# Altium PCB Sensor_Box_Water_Meter_Valve.PCBDOC (part 2 of 2)
Units mil, origin at the board's own origin, x right, y up, seen from the top; angles counter-clockwise.
Board outline 842.52 x 2866.14 mil, 2 copper layers (Top, Bot), stack 63.824 mil thick; 67 components, 54 nets, 224 pads, 112 vias.
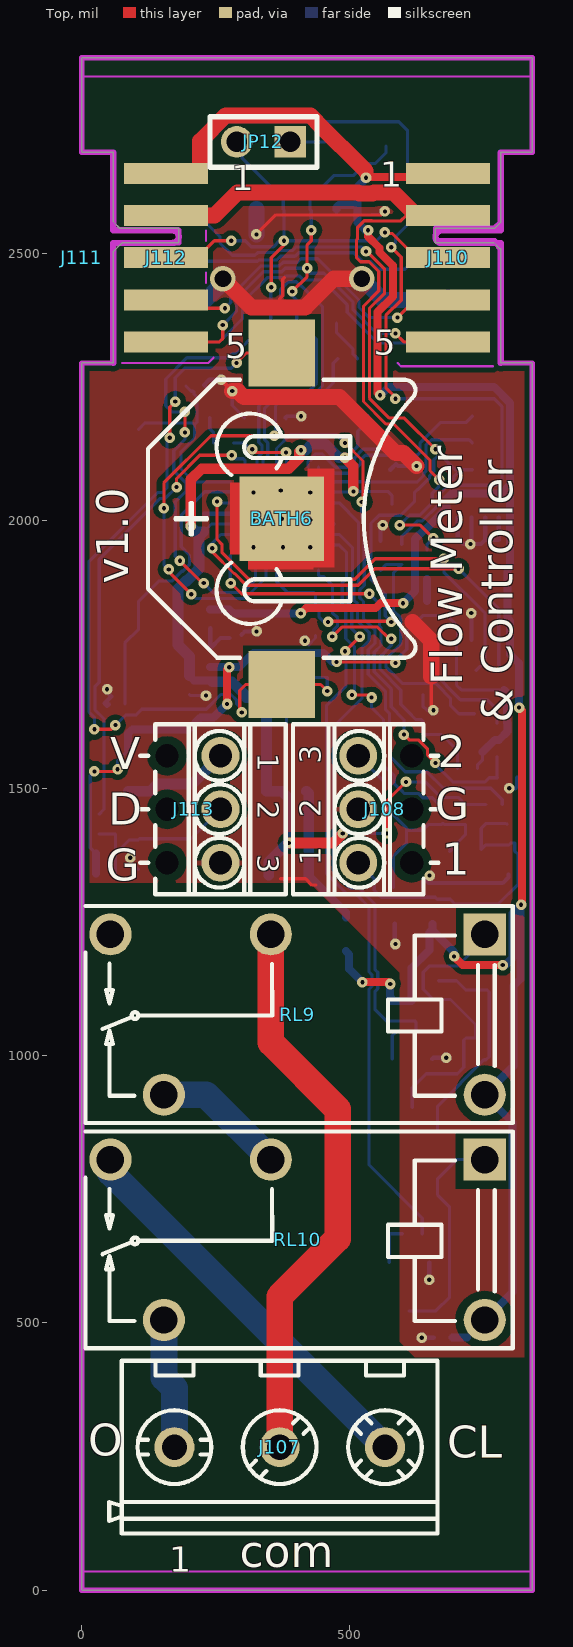
[diagram p0: Top view]

## Via types
v1: diameter 19.68, hole 7.87, Top to Bot, tented both sides, 110 vias
v2: diameter 47.24, hole 31.5, Top to Bot, tented both sides, 2 vias

## Nets (pads, with @x,y where several pads share a name; then routed paths per layer and width w, separated by ;. In a path a pad name is that pad's centre, name@x,y a point inside that pad or via, vN(x,y) a via of type N, cw(c..) or ccw(c..) an arc to the next point about the centre after c; other vN are vias at no path point) (continued)
NetRL9_4: (continued)
  Bot w50: RL9.4 232.28,926.77 RL10.2
Open: J107.1 RL10.4 | length 245.9
  Bot w50: RL10.4 153.54,397.64 173.23,377.95 J107.1
P3V3: C314.2 F1.2 IC27.8 IC108.2 R116.1 R443.1 R450.2 R458.2 R459.2 T33.2 | length 1527.1
  Top w6: v1(23.62,1531.5) 62.99,1531.5 v1(66.93,1535.43) ; v1(476.38,1736.22) 580.7,1736.22 582.67,1734.25 v1(586.61,1734.25)
  Top w15: v1(271.65,1657.48) 271.65,1722.44 v1(275.59,1726.38)
  Bot w6: v1(23.62,1531.5) 15.75,1523.62 15.75,1388.38 R458.2 ; v1(66.93,1535.43) 66.93,1551.18 86.61,1570.87 F1.2 ; v1(586.61,1734.25) 586.61,1738.98 607.58,1759.94 607.58,1793.11 637.31,1822.83 683.17,1822.83 703.08,1802.92 IC27.8 700.79,1775.59 R443.1 700.79,1692.91 709.84,1683.86 R116.1 ; R450.2 739.77,1543.31 749.51,1553.05 749.51,1567.42
  Bot w15: R459.2 R458.2 ; F1.2 86.61,1602.36 94.49,1610.24 199.98,1610.24 222,1632.26 246.43,1632.26 v1(271.65,1657.48) ; C314.2 v1(275.59,1726.38) 294.49,1726.38 321.06,1752.95 IC108.2 451.77,1752.95 468.5,1736.22 v1(476.38,1736.22) ; 749.51,1567.42 772.64,1590.55 780.51,1590.55 796.26,1606.3 T33.2 795.37,1622.54 795.37,1660.09 796.26,1660.98 796.26,1676.97 R116.1
P3V3_UPC: C310.2 C318.2 D136.3 IC106.4 IC106.18 J109.2 R316.2 R444.1 R456.2 T35.2 T35.3 T36.2 | length 2102.9
  Top w6: v1(570.56,1415.36) 570.56,1476.07 v1(606.3,1511.81)
  Top w20: v1(203.88,1990.16) 203.88,2077.15 224.41,2097.68 386.75,2097.68 406.73,2117.66 406.73,2128.93 v1(409.93,2132.13) ; v1(387.01,1397.64) 470.47,1397.64 v1(488.19,1415.36) ; v1(492.13,2118.11) 507.87,2102.36 v1(507.87,2055.12)
  Bot w6: C310.2 242.6,1994.1 IC106.4 ; IC106.18 471.46,2054.13 506.89,2054.13 v1(507.87,2055.12) 572.42,2055.12 579.92,2047.61 R444.1 ; v1(488.19,1415.36) v1(570.56,1415.36) ; v1@499.53,2123.06 516.03,2139.56 516.03,2167.21 535.38,2186.57 J109.2@535.38,2196.85 ; v1(606.3,1511.81) 642.03,1511.81 671.03,1482.8 703.9,1482.8 R456.2 R316.2
  Bot w15: C318.2 210.26,1701.67 241.59,1701.67 244.09,1699.17
  Bot w20: C318.2 201.31,1746.42 180.01,1767.72 180.01,1873.06 194.56,1887.61 196.52,1887.61 219.25,1910.35 219.25,1938.52 219.25,1943.62 219.02,1943.84 219.02,1970.52 C310.2 214.19,1979.84 v1(203.88,1990.16) ; 244.09,1699.17 280.65,1699.17 307.5,1672.33 307.5,1669.66 D136.3 345.47,1662.77 T36.2 374.14,1494.09 387.01,1481.23 T35.3 v1@387.01,1399.25 ; T35.2@349.6,1337.09 T35.2 349.6,1361.85 v1@387.01,1399.25 ; v1(387.01,1397.64) v1@387.01,1399.25 ; v1(409.93,2132.13) 418.7,2132.13 429.7,2143.13 456.13,2143.13 481.15,2118.11 v1(492.13,2118.11)
P5V0: C308.1 C309.1 C313.2 C315.1 D128.1 IC107.8 IC108.1 J110.1 J112.1 R457.2 RL9.5 RL10.5 | length 4649.7
  Top w15: v1(409.45,1826.77) 419.65,1836.97 549.67,1836.97 558.73,1846.03 v1(600.73,1846.03) ; v1(524.77,1137.17) 573.46,1137.17 v1(576.77,1133.86) ; v1(531.5,2641.73) 532.39,2642.62 670.18,2642.62 J110.1@681.1,2653.54 ; v1(535.43,2543.3) 535.43,2531.59 556.4,2510.63 556.4,2502.55 581.74,2477.2 581.74,2419.11 553.27,2390.64 553.27,2239.35 v1(557.73,2234.89) ; v1(696.21,1185.47) 712.39,1169.29 v1(787.4,1169.29) ; v1(817.72,1650.84) 823.15,1645.41 823.15,1283.78 v1(821.55,1282.18)
  Top w30: J112.1 216.54,2649.61 221.22,2654.29 221.22,2710.16 269.25,2758.19 427.58,2758.19 439.29,2746.47 439.29,2745.75 530.75,2654.29
  Bot w15: C313.2 275.59,1834.65 283.46,1826.77 379.92,1826.77 406.69,1826.77 v1(409.45,1826.77) ; IC107.8 476.57,2586.24 480.89,2590.55 515.75,2590.55 ; R457.2@493.77,1195.28 500.04,1189.01 500.04,1161.91 v1(524.77,1137.17) ; v1(531.5,2641.73) 531.5,2640.46 515.75,2624.71 515.75,2608.26 ; v1(535.43,2543.3) 530.75,2543.3 515.75,2558.31 515.75,2590.55 ; C315.1 515.75,2608.26 ; v1(557.73,2234.89) 558.99,2234.89 574.79,2250.68 770.74,2250.68 801.06,2220.36 801.06,2066.93 ; v1(576.77,1133.86) 576.77,1108.66 579.92,1105.51 D128.1 616.16,1102.36 616.16,1163.34 650.46,1197.63 650.46,1230.18 C309.1@656.1,1235.83 ; v1(600.73,1846.03) 623.13,1868.43 623.13,1965.81 641.3,1983.98 642.64,1983.98 681.72,2023.07 681.72,2040.94 691.97,2051.18 785.31,2051.18 801.06,2066.93 ; C309.1 C309.1@656.1,1235.83 ; C308.1 720.47,472.44 ; v1(696.21,1185.47) 696.21,1193.94 656.1,1234.05 C309.1@656.1,1235.83 ; RL10.5 805.91,557.87 805.91,874.41 RL9.5 807.48,980.71 807.48,1130.51 820,1143.04 v1@820,1280.63 ; v1(787.4,1169.29) 792.48,1169.29 805.41,1182.22 805.41,1266.04 v1@820,1280.63 ; v1(817.72,1650.84) 817.72,1733.82 801.21,1750.32 801.21,1812.86 796.55,1817.51 796.55,1909.27 801.21,1913.92 801.21,2066.78 801.06,2066.93 ; v1(821.55,1282.18) v1@820,1280.63 ; 515.75,2590.55 515.75,2608.26
P12V0: D129.1 J110.2 J112.2 | length 1548.5
  Top w6: v1(594.49,1992.12) 632.68,1992.12 v1(657.53,1967.27) ; v1(668.23,2077.02) 651.23,2094.01 651.23,2113.38 583.51,2181.1 568.8,2181.1 526.77,2223.13 526.77,2401.61 555.24,2430.08 555.24,2466.23 537.1,2484.37 521.16,2484.37 513.65,2491.88 513.65,2525.29 515.75,2527.39 515.75,2548.85 528.04,2561.14 542.82,2561.14 543.07,2560.89 596.33,2560.89 606.3,2570.87 J110.2
  Top w30: J112.2@157.48,2570.87 248.03,2570.87 291.34,2614.17 516.85,2614.17 519.14,2611.89 543.86,2611.89 546.14,2614.17 582.68,2614.17 622.05,2574.8 J110.2@685.04,2574.8
  Bot w6: v1(594.49,1992.12) 612.85,2010.48 631.66,2010.48 655.22,2034.04 655.22,2051.92 668.23,2064.92 v1(668.23,2077.02) v1@669.29,2078.08 ; D129.1 645.67,1956.3 656.64,1967.27 v1(657.53,1967.27)
PGood: IC106.1 R448.2 T33.6 | length 882.5
  Top w6: v1(278.38,1883.69) 298.61,1863.46 v1(537.77,1863.46) ; v1(602.36,1600.27) 612.35,1590.28 629.31,1590.28 646.68,1572.91 646.68,1561.98 v1(661.42,1547.24)
  Bot w6: IC106.1 277.56,1884.51 v1(278.38,1883.69) ; v1(537.77,1863.46) 556.52,1844.72 556.52,1802.97 559.53,1799.96 559.53,1766.96 546.77,1754.2 546.77,1717.75 578.74,1685.78 578.74,1651.98 602.36,1628.36 v1(602.36,1600.27) ; v1(661.42,1547.24) 661.42,1543.81 693.41,1511.81 754.29,1511.81 762.17,1519.69 776.77,1519.69 776.58,1519.88 T33.6
PROG_MISO: IC106.16 J109.1 | length 356
  Bot w6: IC106.16 442.91,2091.95 445.76,2089.11 504.14,2089.11 521.13,2106.09 521.13,2113.54 530.29,2122.71 627.33,2122.71 632.57,2127.95 632.57,2145.81 670.48,2183.71 718.35,2183.71 J109.1
PROG_MOSI: IC106.15 J109.4 | length 205.4
  Bot w6: IC106.15 423.23,2111.22 426.13,2114.13 429.01,2114.13 429.01,2116.98 437.15,2125.13 448.67,2125.13 473.69,2100.11 499.58,2100.11 510.13,2110.65 510.13,2118.1 525.74,2133.71 564.81,2133.71 J109.4
PROG_SCK: IC106.17 J109.3 | length 326.1
  Bot w6: IC106.17 470.6,2072.96 525.96,2072.96 526.21,2072.71 627.33,2072.71 639.39,2084.77 639.39,2088.96 643.83,2093.4 643.83,2119.86 643.57,2120.11 643.57,2141.25 654.03,2151.7 724.28,2151.7 J109.3
REL1: IC106.19 R445.1 | length 1168.3
  Bot w6: IC106.19 481.3,2033.47 517.21,1997.56 517.21,1883.69 508.93,1875.41 508.93,1851.52 515.77,1844.67 515.77,1812.61 537.53,1790.85 537.53,1776.07 524.09,1762.63 524.09,1668.14 470.35,1614.4 470.35,1343.12 500.89,1312.57 518.95,1312.57 548.1,1283.42 548.1,1161.06 552.79,1156.37 553.61,1156.37 553.61,1125.22 548.1,1119.71 548.1,1086.25 569.5,1064.85 622.55,1064.85 624.8,1062.6 R445.1
REL2: IC106.22 R446.1 | length 1467.3
  Top w6: v1@487.91,1756.18 v1(492.4,1756.18) v1(519.68,1783.46)
  Bot w6: IC106.22 481.3,1974.41 506.21,1949.5 506.21,1888.24 497.93,1879.97 497.93,1846.96 504.77,1840.12 504.77,1798.37 v1(519.68,1783.46) ; v1@488.19,1751.97 v1(492.4,1756.18) 494.22,1754.36 494.22,1691.83 457.8,1655.41 457.8,1340.1 496.33,1301.57 513.39,1301.57 537.1,1277.86 537.1,1156.5 542.61,1150.99 542.61,1129.78 537.1,1124.27 537.1,795.57 636.61,696.06 R446.1
RESETn: D133.1 IC106.29 J109.5 J112.7 R444.2 | length 1757.3
  Top w6: v1(460.63,1811.02) 461.91,1812.3 577.46,1812.3 v1(578.74,1811.02) ; v1(531.5,2503.93) 533.1,2503.93 566.24,2470.78 566.24,2425.53 537.77,2397.06 537.77,2229.61 575.28,2192.1 603.17,2192.1 v1(661.42,2133.86)
  Bot w6: J112.7 216.54,2570.87 233.22,2554.18 235.51,2554.18 258.45,2531.24 258.45,2519.47 281.39,2496.53 323.68,2496.53 328.79,2501.63 363.19,2501.63 367.33,2505.77 394.31,2505.77 400.81,2512.28 523.15,2512.28 v1(531.5,2503.93) ; v1@452.76,1811.02 443.85,1819.92 443.85,1834.06 D133.1 437.01,1862.2 433.07,1866.14 384.04,1866.14 365.16,1885.02 ; v1(578.74,1811.02) 567.52,1822.24 567.52,1862.77 540.89,1889.4 540.89,1995.25 556.12,2010.48 596.72,2010.48 R444.2 622.05,2035.8 622.05,2052.56 628.54,2059.06 629.23,2059.06 650.39,2080.21 650.39,2084.41 658.29,2092.31 658.29,2113.95 664.74,2120.39 673.85,2120.39 ; v1(661.42,2133.86) 661.42,2132.82 673.85,2120.39 ; J109.5 J109.5@708.17,2095.67 ; 365.16,1885.02 365.16,1906.5 IC106.29 364.17,1886 365.16,1885.02 ; 673.85,2120.39 680.29,2113.95 ; 680.29,2113.95 686.07,2108.17 J109.5@686.07,2107.63 ; 680.29,2113.95 680.29,2113.41 J109.5@686.07,2107.63 ; J109.5@686.07,2107.63 686.07,2077.71 696.21,2077.71 696.21,2083.71 J109.5@708.17,2095.67 ; J109.5@686.07,2107.63 698.03,2095.67 J109.5@708.17,2095.67
RSV0: J110.4 J112.4 | length 647.1
  Top w6: J112.4 216.54,2413.38 232.28,2397.64 v1(267.72,2397.64) ; v1(590.22,2380.04) 623.56,2413.38 J110.4
  Bot w6: v1(267.72,2397.64) 278.38,2408.3 278.38,2420.12 335.11,2476.85 369.51,2476.85 376.44,2483.77 403.42,2483.77 409.93,2490.28 441.12,2490.28 518.39,2413.02 518.39,2398.94 537.28,2380.04 v1(590.22,2380.04)
RSV1: J110.6 J112.6 | length 667.5
  Bot w6: J112.6 216.54,2649.61 233.22,2666.29 233.22,2705.19 274.22,2746.19 592.88,2746.19 609.3,2729.77 609.3,2666.29 625.98,2649.61 J110.6
RSV2: J110.8 J112.8 | length 558.7
  Bot w6: J112.8 164.08,2485.53 328.24,2485.53 330.56,2487.85 364.96,2487.85 371.89,2494.77 398.87,2494.77 405.37,2501.28 508.92,2501.28 525.82,2484.37 540.66,2484.37 554.69,2470.34 604.2,2470.34 625.98,2492.13 J110.8
RSV3: J110.10 J112.10 | length 657.7
  Bot w6: J112.10 257.52,2334.64 300.38,2377.51 300.38,2408.29 346.94,2454.85 378.63,2454.85 381.75,2457.97 406.55,2457.97 413.87,2450.66 449.63,2450.66 496.39,2403.9 496.39,2389.82 553.66,2332.55 682.95,2332.55 J110.10
SCL1: IC27.6 IC106.6 R443.2 | length 825.1
  Top w6: v1(252.9,2036.12) 252.9,1965.24 261.94,1956.21 261.94,1940.92 312.26,1890.6 510.38,1890.6 548.91,1929.13 v1(677.17,1929.13)
  Bot w6: v1(252.9,2036.12) 252.9,2034.5 253.93,2033.47 IC106.6 ; v1(677.17,1929.13) 677.17,1903.94 754.26,1826.84 IC27.6 754.26,1736.94 R443.2
SDA1: IC27.5 IC106.3 R116.2 | length 787.9
  Top w6: v1(244.09,1948.82) 244.09,1942.04 284.6,1901.53 285.77,1901.53 307.7,1879.6 517.07,1879.6 547.82,1910.35 v1(704.72,1910.35)
  Bot w6: v1@237.02,1951.3 v1@238.52,1952.8 ; v1(244.09,1948.82) 242.5,1948.82 v1@238.52,1952.8 ; IC106.3 260.13,1974.41 v1@238.52,1952.8 ; v1(704.72,1910.35) 779.85,1835.22 IC27.5 779.85,1730.38 R116.2
pads on no net: D128.2 D136.2 IC106.2 IC106.14 IC106.20 IC106.24 IC106.26 IC106.27 IC106.28 IC106.32 J108.4 J108.5 J108.6 J113.4 J113.5 J113.6 RL9.3 T33.3 T33.4 T33.5

## Polygon pours and split planes (outlines as drawn)
GND on Top "Signal Layer 1-No Net 1" (solid, remove dead copper, pour order 0): -1.84,2829.71 840.68,2829.71 840.68,436.01 -1.84,436.01

## Keep-outs
Top:
  lines w3.94: 0,35.43 838.58,35.43 ; 0,2830.71 842.52,2830.71 ; 75.27,2295.27 236.54,2295.27 246.22,2304.96 ; 590.55,2295.28 596.76,2289.07 768.48,2289.07
Bot:
  lines w3.94: 0,104.33 842.52,104.33 ; 0,2761.81 842.52,2761.81
KeepOutLayer:
  lines w3.94: 232.28,2444.88 232.28,2464.57 ; 232.28,2523.62 232.28,2543.31
  lines w10: 0,13.78 0,0 ; 0,0 0,5.9 ; 0,0 842.52,0 842.52,2295.27 783.47,2295.27 783.47,2507.87 779.53,2511.81 772.65,2523.68 662.42,2523.68 661.42,2547.24 771.65,2547.24 783.47,2559.05 783.47,2688.98 842.52,2688.98 842.52,2866.14 0,2866.14 0,2688.98 59.06,2688.98 59.06,2543.31 181.1,2543.31 181.1,2519.68 59.06,2519.68 59.06,2295.27 0,2295.27 0,1724.41 0,5.91 ; 0,5.91 0,5.9

## Other copper
Top:
  rectangle net GND: 277.56,1937.01 311.02,2027.4
  rectangle net GND: 277.56,2027.4 326.77,2072.13
  rectangle net GND: 311.02,1909.22 433.07,1937.01
  rectangle net GND: 422.32,1912.53 472.44,2097.44
  pour cut-out: 0,1322.83 426.48,1322.83 594.49,1154.83 594.49,464.57 704.72,354.33 704.72,31.5 3.94,31.5 0,35.43

## Silkscreen, mask and mechanical layers (free items; w line width, h text height)
TopOverlay:
  text "v1.0" at 86.61,1881.89 h60 r90
  text "Flow Meter" at 711.61,1692.91 h59.06 r90
  text "& Controller" at 806.3,1622.05 h59.06 r90
  text "2" at 665.35,1539.37 h60
  text "V" at 53.15,1535.43 h60
  text "G" at 661.42,1440.94 h60
  text "D" at 49.21,1431.9 h60
  text "1" at 673.23,1338.58 h60
  text "G" at 44.68,1326.77 h60
  text "O" at 11.81,251.97 h60
  text "CL" at 683.66,248.03 h60
  text "com" at 295.28,43.31 h60
Mechanical1:
  lines w10: 0,13.78 0,0 ; 0,0 842.52,0 842.52,2295.27 783.47,2295.27 783.47,2507.87 779.53,2511.81 771.65,2519.68 661.42,2519.68 661.42,2543.31 767.72,2543.31 783.47,2559.05 783.47,2688.98 842.52,2688.98 842.52,2866.14 0,2866.14 0,2688.98 59.06,2688.98 59.06,2543.31 181.1,2543.31 181.1,2519.68 59.06,2519.68 59.06,2295.27 0,2295.27 0,1724.41 0,5.91 ; 0,0 0,5.9 ; 0,5.91 0,5.9

## Text inside footprints (layer, text, board x,y; h text height)
J107: TopOverlay "1" at 163.39,34.45 h47.24; Mechanical14 "1" at 96.46,333.66 h47.24
J108: TopOverlay "1" at 447.03,1355.63 h39.37 r90; TopOverlay "2" at 447.03,1445.63 h39.37 r90; TopOverlay "3" at 447.03,1545.63 h39.37 r90
J110: TopOverlay "5" at 546.26,2311.02 h47.24; TopOverlay "1" at 558.07,2625.2 h47.24; BottomOverlay "10" at 511.81,2358.27 h47.24 r180; BottomOverlay "6" at 553.15,2672.44 h47.24 r180
J112: TopOverlay "1" at 280.51,2618.11 h47.24; TopOverlay "5" at 268.7,2303.94 h47.24; BottomOverlay "6" at 285.43,2665.35 h47.24 r180; BottomOverlay "10" at 273.62,2351.18 h47.24 r180
J113: TopOverlay "1" at 329.41,1565.63 h39.37 r270; TopOverlay "2" at 329.41,1475.63 h39.37 r270; TopOverlay "3" at 329.41,1375.63 h39.37 r270